# Altium PCB Daughter_Board_PCB_Layout_REV1.PcbDoc
Units mil, origin at the board's own origin, x right, y up, seen from the top; angles counter-clockwise.
Board outline 1712.6 x 1712.6 mil, 2 copper layers (Top Layer, Bottom Layer); 40 components, 46 nets, 178 pads, 238 vias.
Unrouted connection lines stored in the file: 31.
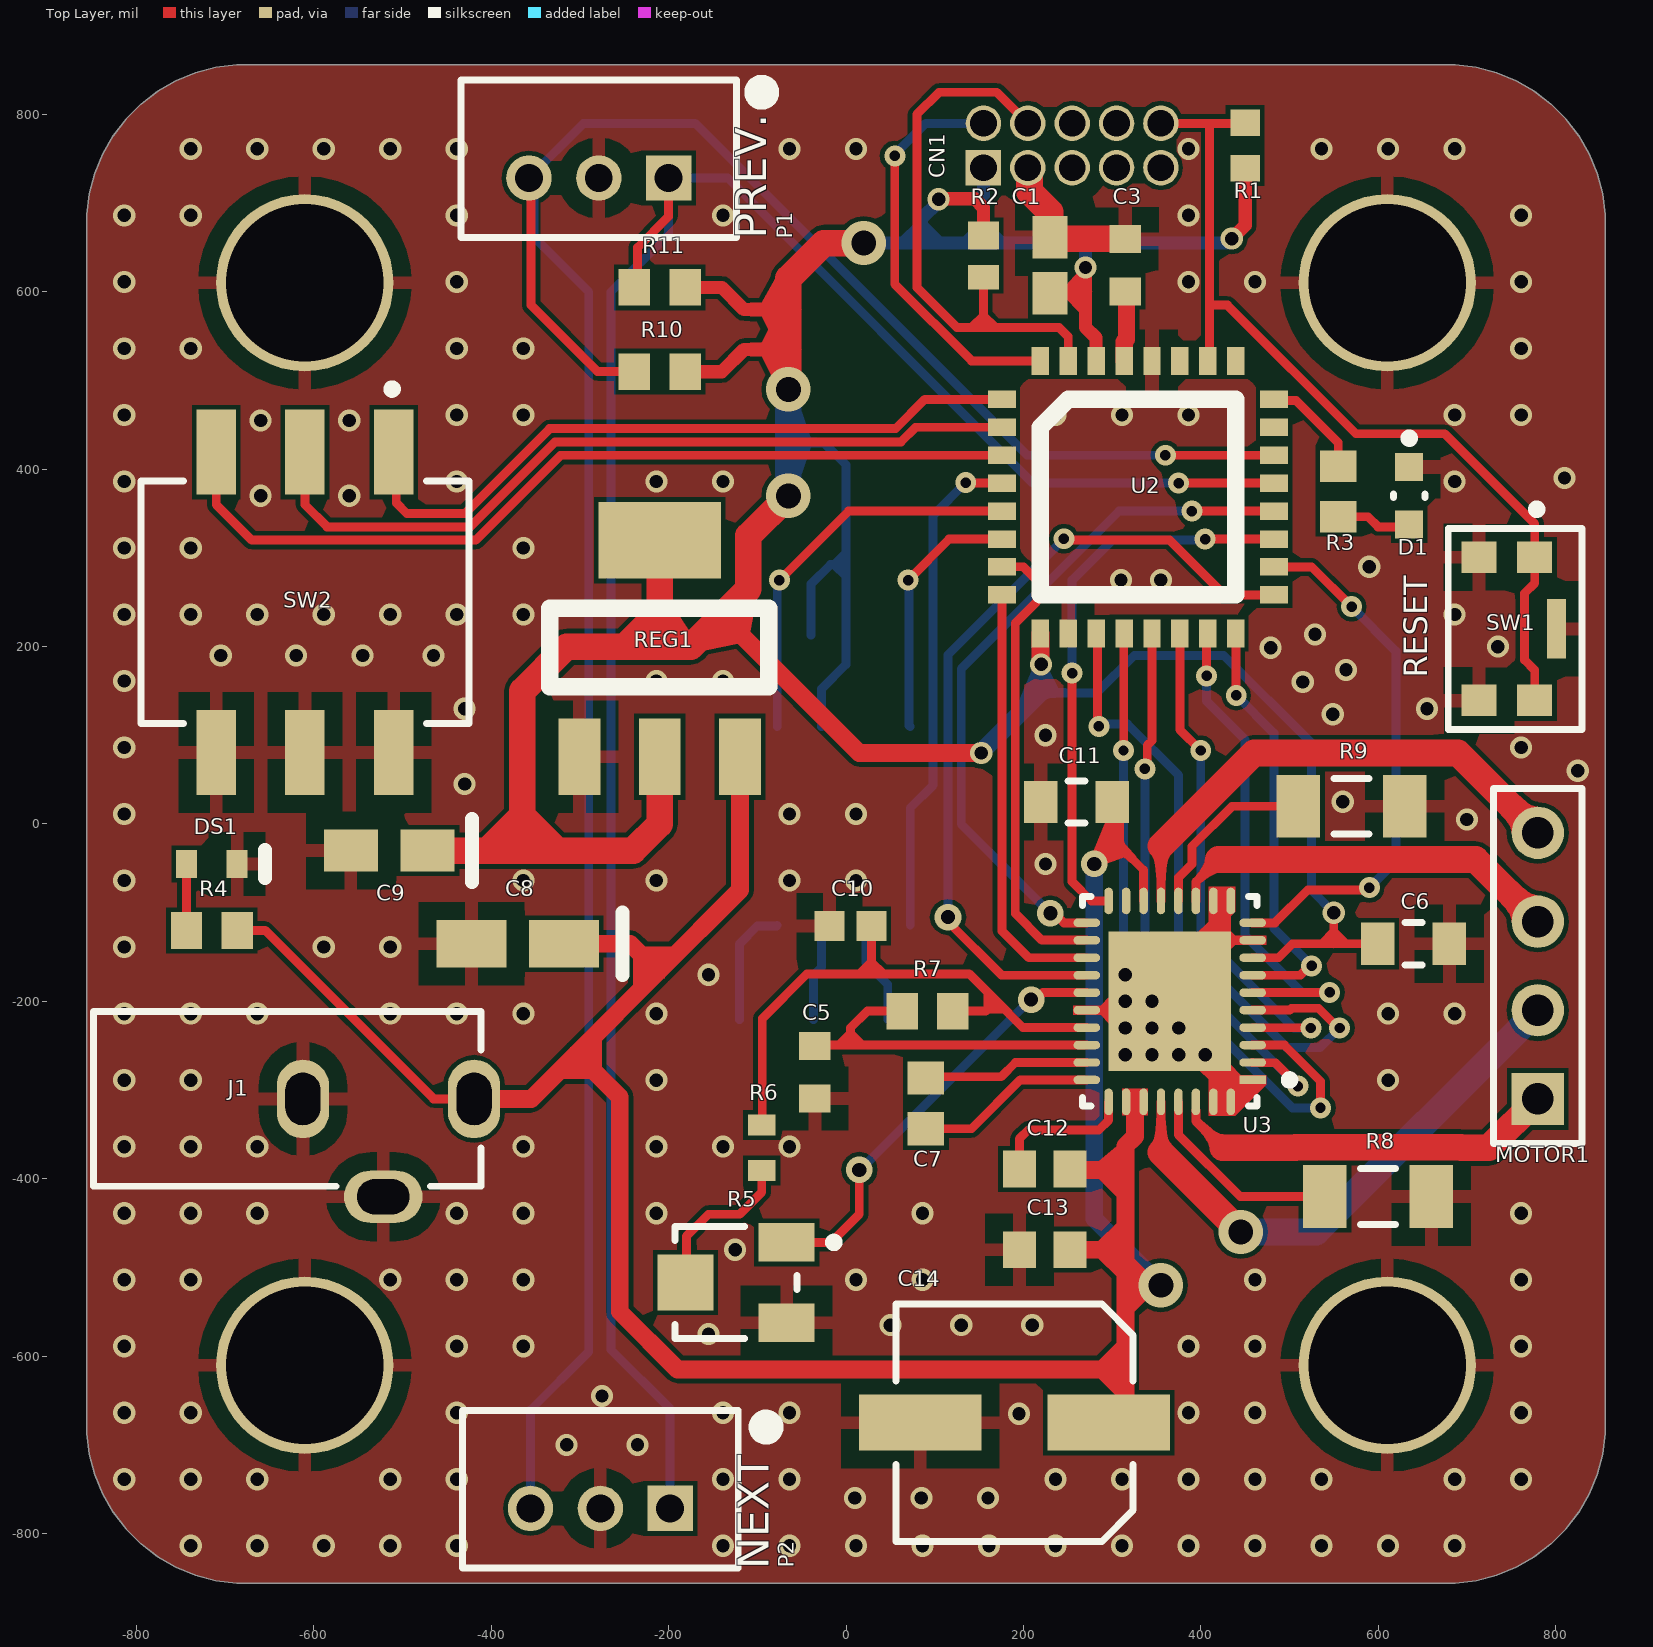
[diagram p0: Top Layer view]
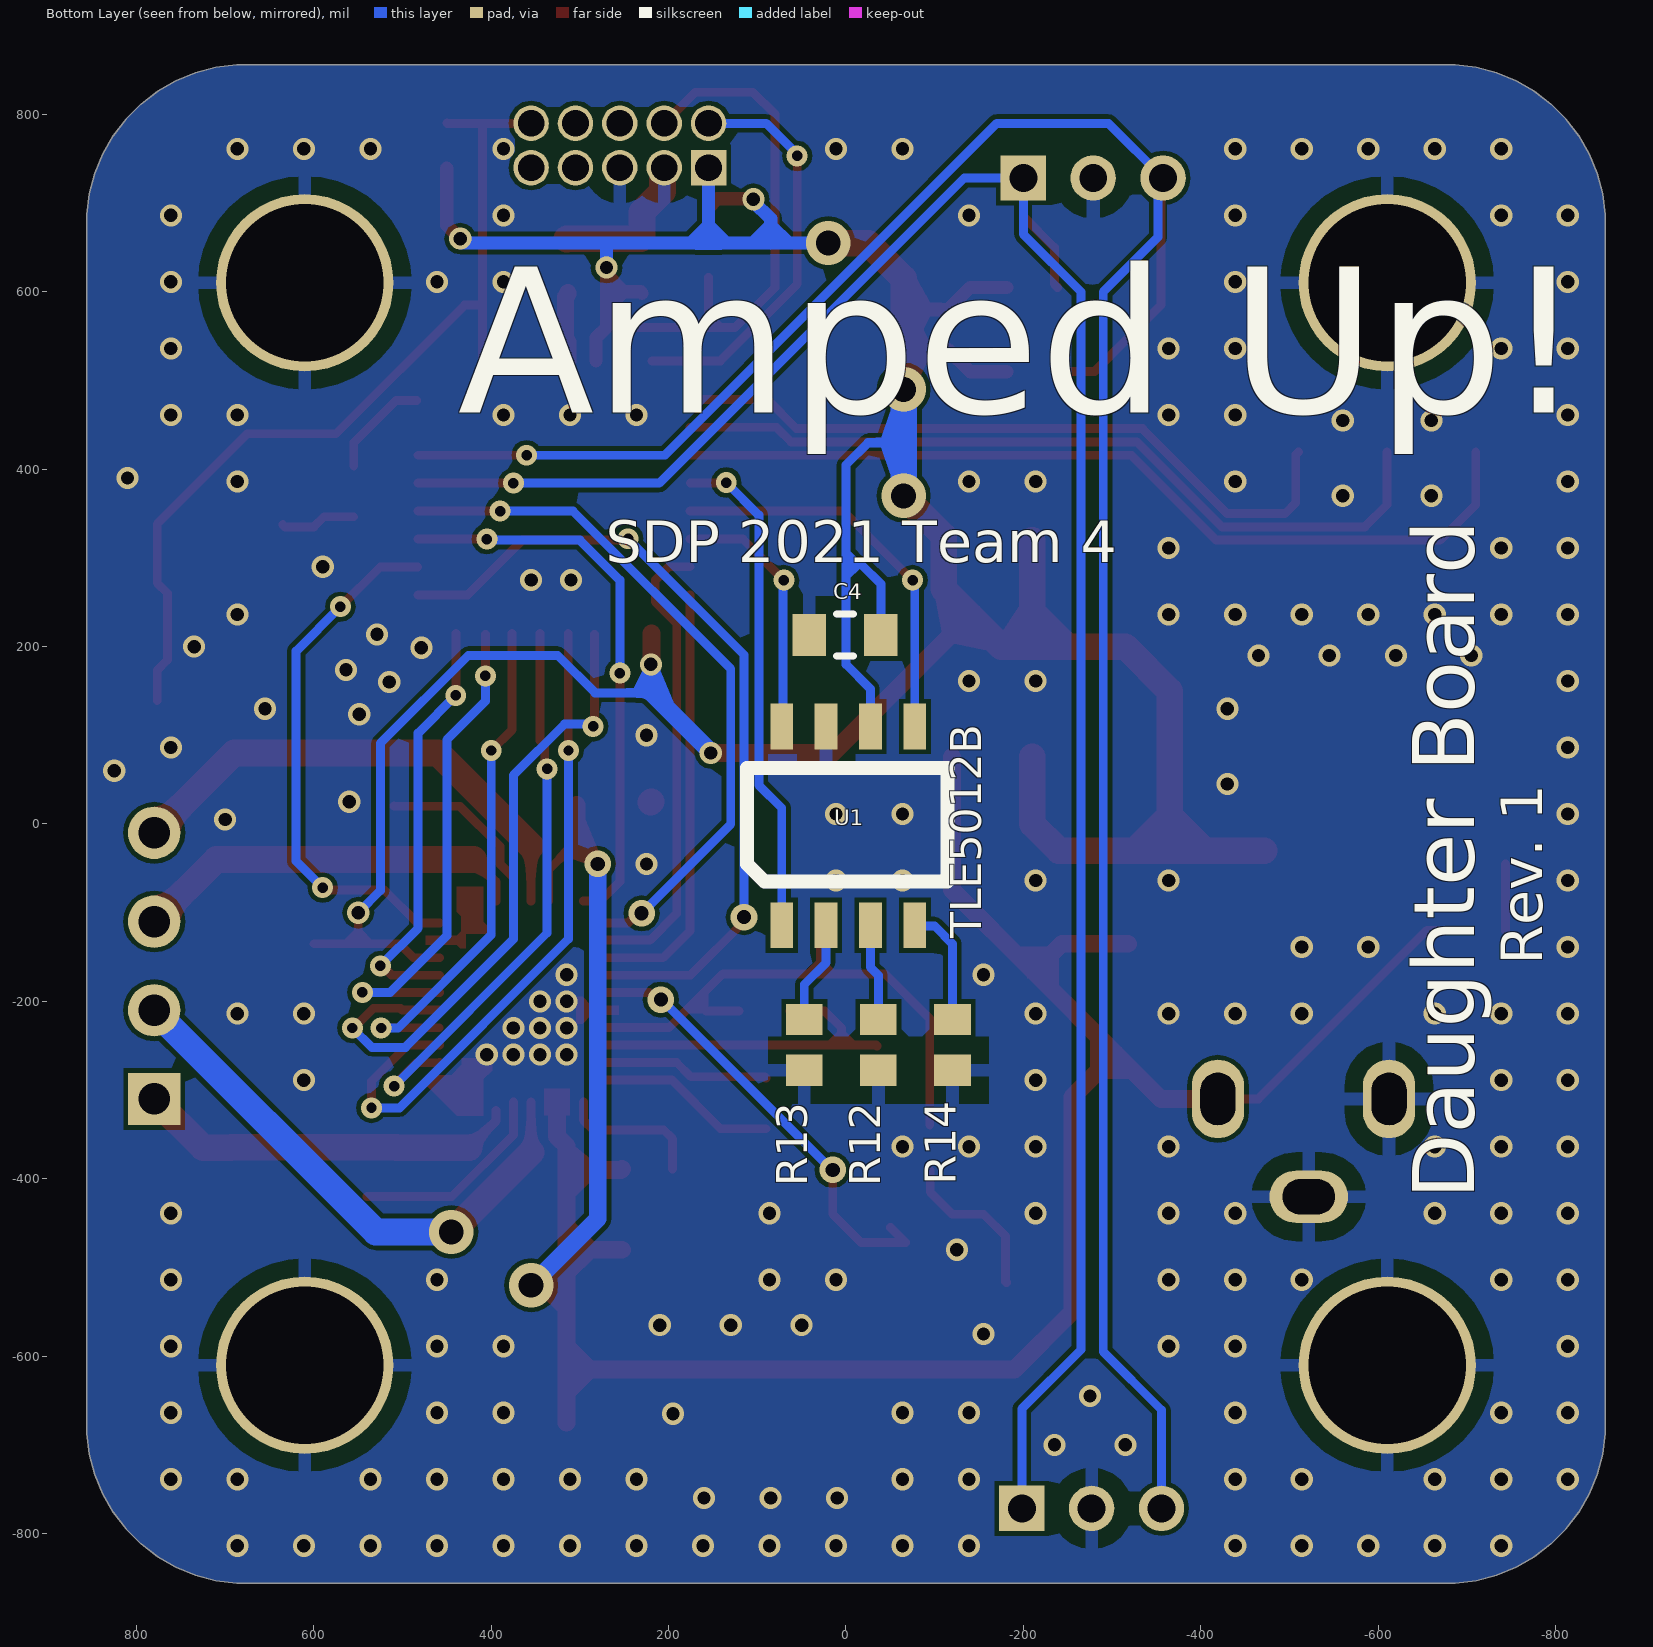
[diagram p1: Bottom Layer view, seen from below]

## Layer stack, top to bottom
Top Solder: solder mask 0.4, Solder Resist, Dk 3.5
Top Layer: signal copper 1.4
Dielectric 1: dielectric 12.6, FR-4, Dk 4.8
Bottom Layer: signal copper 1.4
Bottom Solder: solder mask 0.4, Solder Resist, Dk 3.5

## Board outline
-856.3,-675.2 -856.3,675.2 -856.3,687.07 -853.2,710.6 -847.06,733.54 -837.97,755.47 -826.1,776.03 -811.65,794.86 -794.86,811.65 -776.03,826.1 -755.47,837.97 -733.54,847.06 -710.6,853.2 -687.07,856.3 -675.2,856.3 675.2,856.3 687.07,856.3 710.6,853.2 733.54,847.06 755.47,837.97 776.03,826.1 794.86,811.65 811.65,794.86 826.1,776.03 837.97,755.47 847.06,733.54 853.2,710.6 856.3,687.07 856.3,675.2 856.3,-675.2 856.3,-687.07 853.2,-710.6 847.06,-733.54 837.97,-755.47 826.1,-776.03 811.65,-794.86 794.86,-811.65 776.03,-826.1 755.47,-837.97 733.54,-847.06 710.6,-853.2 687.07,-856.3 675.2,-856.3 -675.2,-856.3 -687.07,-856.3 -710.6,-853.2 -733.54,-847.06 -755.47,-837.97 -776.03,-826.1 -794.86,-811.65 -811.65,-794.86 -826.1,-776.03 -837.97,-755.47 -847.06,-733.54 -853.2,-710.6 -856.3,-687.07 -856.3,-675.2

## Design rules (kind name [scope] priority, off if disabled: settings)
Clearance [All] p1: gap=5 ignorepadtopadclearanceinfootprint=FALSE except(0: Arc-Hole Track-Hole SMDPad-Hole THPad-Hole Via-Hole Fill-Hole Poly-Hole Region-Hole Text-Hole; 10: Arc-THPad Arc-Text Track-THPad Track-Text SMDPad-THPad SMDPad-Text THPad-THPad THPad-Text Via-Text Fill-Text Poly-Text Region-Text Text-Text)
DiffPairsRouting [All] p1: maxlimit=10 minlimit=10 mostfreqgap=10 substack1={84FD49D9-F24D-4FFD-99CB-AB023C1CC38A} toplayer_{84fd49d9-f24d-4ffd-99cb-ab023c1cc38a}_minwidth=15 toplayer_{84fd49d9-f24d-4ffd-99cb-ab023c1cc38a}_maxwidth=15 toplayer_{84fd49d9-f24d-4ffd-99cb-ab023c1cc38a}_prefwidth=15 bottomlayer_{84fd49d9-f24d-4ffd-99cb-ab023c1cc38a}_minwidth=15 bottomlayer_{84fd49d9-f24d-4ffd-99cb-ab023c1cc38a}_maxwidth=15 bottomlayer_{84fd49d9-f24d-4ffd-99cb-ab023c1cc38a}_prefwidth=15 toplayer_minwidth=15 toplayer_maxwidth=15 toplayer_prefwidth=15 bottomlayer_minwidth=15 bottomlayer_maxwidth=15 bottomlayer_prefwidth=15 maxuncoupledlength=500
HoleSize [All] p1: absolutevalues=TRUE maxlimit=1931.5 minlimit=1 maxpercent=80.000 minpercent=20.000
MinimumSolderMaskSliver [All] p1: minsoldermaskwidth=7.87
PolygonConnect [All] p1: thpad.connectstyle=Relief thpad.reliefconductorwidth=15 thpad.reliefentries=4 thpad.polygonreliefangle="90 Angle" thpad.airgapwidth=20 smdpad.connectstyle=Relief smdpad.reliefconductorwidth=15 smdpad.reliefentries=4 smdpad.polygonreliefangle="90 Angle" smdpad.airgapwidth=20 via.connectstyle=Direct via.reliefconductorwidth=15 via.reliefentries=4 via.polygonreliefangle="90 Angle" via.airgapwidth=20
RoutingVias RoutingVias_1 [InNet('+3.3V') OR InNet('+5') OR InNet('GND') OR InNet('VBB')] p1: holewidth=28 width=50 viastyle="Through Hole" minholewidth=15 minwidth=25 maxholewidth=100 maxwidth=150
RoutingVias [All] p2: holewidth=11.81 width=23.62 viastyle="Through Hole" minholewidth=11.81 minwidth=23.62 maxholewidth=248.03 maxwidth=314.96
SilkToSilkClearance [All] p1: silktosilkclearance=0
SilkToSolderMaskClearance [IsPad] p1: minsilkscreentomaskgap=5 clearancetoexposedcopper=TRUE
SolderMaskExpansion SolderMaskExpansion_1 [IsVia] p1: expansion=4 istentingtop=TRUE
SolderMaskExpansion [All] p2: expansion=4 istentingtop=FALSE
Width [All] p1: maxlimit=30 minlimit=6 preferedwidth=10 substack1={84FD49D9-F24D-4FFD-99CB-AB023C1CC38A} toplayer_{84fd49d9-f24d-4ffd-99cb-ab023c1cc38a}_minwidth=10 toplayer_{84fd49d9-f24d-4ffd-99cb-ab023c1cc38a}_maxwidth=40 toplayer_{84fd49d9-f24d-4ffd-99cb-ab023c1cc38a}_prefwidth=20 bottomlayer_{84fd49d9-f24d-4ffd-99cb-ab023c1cc38a}_minwidth=10 bottomlayer_{84fd49d9-f24d-4ffd-99cb-ab023c1cc38a}_maxwidth=40 bottomlayer_{84fd49d9-f24d-4ffd-99cb-ab023c1cc38a}_prefwidth=20 minimp=50.000000 maximp=50.000000 favimp=50.000000
25 further rules are at their usual default settings.

## Components (designator, comment, footprint, x,y, rotation, side; value= is the part's Value field where it differs from the comment)
C1 "10uF" FP-GRM188-0_1-e0_2_0_55-IPC_A 230,630 r270 top
C3 "1uF" FP-CC0603-DA-MFG 315,630 r90 top value="1 uF"
C4 "100nF" FP-CGA3E-0_3-0_1-IPC_A 1,213 r180 bottom
C5 "470nF" FP-CC0603-DA-MFG -35,-280 r90 top value="470 nF"
C6 "100nF" FP-CGA3E-0_3-0_1-IPC_A 640,-135 r0 top
C7 "22nF" CAPC1608X90X35ML10T15 90,-315 r270 top
C8 "10uF" KEMT-A-3216-18-2_M -370,-135 r180 top
C9 "22uF" AVX-TAJ-A-2_L -515,-30 r180 top
C10 "4.7uF" FP-GRM188-0_15-IPC_C 5,-115 r180 top
C11 "100nF" FP-CGA3E-0_3-0_1-IPC_A 260,25 r180 top
C12 "100nF" CAPC1608X90X35ML10T15 224,-389 r0 top
C13 "100nF" CAPC1608X90X35ML10T15 224,-480 r0 top
C14 "10uF" NIC-CAPA2-6.3X5.8_V 190,-675 r180 top
CN1 "JTAG Connector" "Header 5x2 - 50mil" 155,740 r90 top
D1 "APT1608LZGCK" FP-APT1608LZGCK-MFG 635,370 r270 top
DS1 "TLMS1100-GS08" VISH-TLMX1100_V -715,-45 r0 top
J1 "694103303002" 694103303002 -630,-310 r270 top
MOTOR1 "Header 4" HDR1X4 780,-310 r90 top
P1 "B3B-PH-K-S(LF)(SN)" JST-B3B-PH-K-S-3_V -278.74,750 r180 top
P2 "B3B-PH-K-S(LF)(SN)" JST-B3B-PH-K-S-3_V -277,-750 r180 top
R1 "10K" RESC1609X55X30LL15T15 450,765 r90 top
R2 "1K" RESC1608X55X30LL20T20 155,640 r90 top
R3 "330" RESC1608X55X30ML15T15 555,375 r90 top
R4 "500" RESC1608X55X30ML15T15 -715,-120 r0 top
R5 "20K" BOUR-3313J-1_V -124,-517 r180 top
R6 "20K" RESC1608X55X25LL10T15 -95,-365 r90 top
R7 "2.2" RESC1608X55X30ML15T15 92,-211 r0 top
R8 "0.11" RESC3116X65X40ML10T20 600,-420 r0 top
R9 "0.11" RESC3116X65X40ML10T20 570,20 r0 top
R10 "10k" RESC1608X55X30ML15T15 -210,510 r0 top
R11 "10k" RESC1608X55X30ML15T15 -210,605 r0 top
R12 "10k" RESC1608X55X30ML15T15 -36.5,-249 r90 bottom
R13 "10k" RESC1608X55X30ML15T15 47,-249 r90 bottom
R14 "10k" RESC1608X55X30ML15T15 -120,-249 r90 bottom
REG1 "Voltage Reg" SOT223 -300.55,75.91 r0 top
SW1 "KMR211GLFS" FP-KMR211GLFS-MFG 745,220 r270 top
SW2 "219-3MSTR" FP-219-3MSTR-MFG -610,250 r180 top
U1 "TLE5012B" PG-DSO-8 72.44,-114.17 r180 bottom locked
U2 "ATSAMD21E15B-AUT" TQFP-32 175.71,478.78 r0 top
U3 "TMC2130-LA" FP-TMC2130-LA-IPC_C 365,-200 r180 top locked

## Footprints (in the part's own frame and the unit in brackets; to place one, negate y for a bottom-side part, rotate by r counter-clockwise, add the part's x,y. Pads: shape width x height; smd on the part's side, far side on the other; paste and mask are expansions set on the pad)
694103303002 [mm] "DC Power Jack Right Angled(4.2)"
  oval 2.25x1.5 hole 1 slot 1.5 at 0 deg: 1(0,5.35) 2(0,0.45)
  oval 1.5x2.25 hole 1 slot 1.5 at 90 deg: 3(2.8,2.75)
  silkscreen extent -2.5,-5.55 2.5,5.55, body extent -2.5,-5.55 3,5.75, height 7.8
AVX-TAJ-A-2_L [mm] "Molded Capacitor, 2-Leads, Body 3.4x1.8mm, IPC High Density"
  rect 1.55x1.2 smd: 1(-1.1,0) 2(1.1,0)
  silkscreen extent -2.37,-0.9 -2.37,0.9, body extent -1.92,-0.9 1.92,0.9, height 1.8
BOUR-3313J-1_V [mm] "SMD, 3-Leads, Body 3.5x3.2mm, Pitch 1.15mm"
  rect 1.6x1.1 smd paste+0: 1(-1.45,-1.15) 3(-1.45,1.15)
  rect 1.6x1.6 smd paste+0: 2(1.45,0)
  silkscreen extent -2.93,-1.6 1.75,1.6, body extent -1.75,-1.65 1.75,1.65, height 2.11
CAPC1608X90X35ML10T15 [mm] "Chip Capacitor, 2-Leads, Body 1.60x0.80mm, IPC Low Density"
  rect 0.95x1.05 smd: 1(-0.725,0) 2(0.725,0)
  body extent -0.85,-0.45 0.85,0.45, height 0.9
FP-219-3MSTR-MFG [mm]
  rect 1.13x2.44 smd paste+0 mask+0: 1(-2.54,-4.3) 2(0,-4.3) 3(2.54,-4.3) 4(2.54,4.3) 5(0,4.3) 6(-2.54,4.3)
  silkscreen extent -4.69,-6.23 4.69,3.47, body extent -4.8,-5.62 4.8,5.62, height 0.25
FP-APT1608LZGCK-MFG [mm]
  rect 0.8x0.8 smd paste+0 mask+0: 1(-0.825,0) 2(0.825,0)
  silkscreen extent -1.78,-0.45 0.05,0.45, body extent -1.33,-0.55 1.33,0.55, height 0.25
FP-CC0603-DA-MFG [mm]
  rect 0.8x0.9 smd paste+0 mask+0: 1(-0.75,0) 2(0.75,0)
  body extent -1.35,-0.75 1.35,0.75, height 0.25
FP-CGA3E-0_3-0_1-IPC_A [mm]
  rect 0.956x1.206 smd paste+0 mask+0: 1(-1.025,0) 2(1.025,0)
  silkscreen extent -0.25,-0.6 0.25,0.6, body extent -0.8,-0.4 0.8,0.4, height 1.1
FP-GRM188-0_1-e0_2_0_55-IPC_A [mil]
  rect 47.57x39.85 smd paste+0 mask+0: 1(-31.57,0) 2(31.57,0)
  body extent -75,-40 75,40, height 10
FP-GRM188-0_15-IPC_C [mil]
  rect 33.71x33.79 smd paste+0 mask+0: 1(-23.66,0) 2(23.66,0)
FP-KMR211GLFS-MFG [mm]
  rect 0.9x1 smd paste+0 mask+0: 1(-2.05,0.8) 2(2.05,0.8) 3(-2.05,-0.8) 4(2.05,-0.8)
  rect 1.7x0.55 smd paste+0 mask+0: 5(0,1.425)
  silkscreen extent -3.55,-1.68 2.88,2.15
FP-TMC2130-LA-IPC_C [mm]
  rect 0.761x0.242 smd paste+0 mask+0: 1(-2.376,2.25)
  rrect100% 0.761x0.242 smd paste+0 mask+0: 2(-2.376,1.75) 3(-2.376,1.25) 4(-2.376,0.75) 5(-2.376,0.25) 6(-2.376,-0.25) 7(-2.376,-0.75) 8(-2.376,-1.25) 9(-2.376,-1.75) 10(-2.376,-2.25) 19(2.376,-2.25) 20(2.376,-1.75) 21(2.376,-1.25) 22(2.376,-0.75) 23(2.376,-0.25) 24(2.376,0.25) 25(2.376,0.75) 26(2.376,1.25) 27(2.376,1.75) 28(2.376,2.25)
  rrect100% 0.242x0.761 smd paste+0 mask+0: 11(-1.75,-2.876) 12(-1.25,-2.876) 13(-0.75,-2.876) 14(-0.25,-2.876) 15(0.25,-2.876) 16(0.75,-2.876) 17(1.25,-2.876) 18(1.75,-2.876) 29(1.75,2.876) 30(1.25,2.876) 31(0.75,2.876) 32(0.25,2.876) 33(-0.25,2.876) 34(-0.75,2.876) 35(-1.25,2.876) 36(-1.75,2.876)
  rect 3.5x4 smd paste-1000 mask+0: 37(0,0)
  silkscreen extent -3.56,-3 2.5,3, body extent -2.86,-3.36 2.86,3.36, height 0.25
HDR1X4 [mm] "Connector; Header; 4 Position"
  rect 1.5x1.5 hole 0.9: 1(0,0)
  round 1.5 hole 0.9: 2(2.54,0) 3(5.08,0) 4(7.62,0)
  silkscreen extent -1.27,-1.27 8.89,1.27
"Header 5x2 - 50mil" [mil]
  rect 40x40 hole 30 mask+0: 1(0,0)
  round 40 hole 30 mask+0: 2(50,0) 3(0,-50) 4(50,-50) 5(0,-100) 6(50,-100) 7(0,-150) 8(50,-150) 9(0,-200) 10(50,-200)
JST-B3B-PH-K-S-3_V [mm] "Connector, 3-Leads, Body 7.9x4.5mm, Pitch 2mm"
  rect 1.3x1.3 hole 0.8: 1(-2,0.55)
  round 1.3 hole 0.8: 2(0,0.55) 3(2,0.55)
  silkscreen extent -4.92,-2.25 3.95,2.25, body extent -3.95,-2.25 3.95,2.25, height 6
KEMT-A-3216-18-2_M [mm] "Molded TAN Capacitor, 2-Leads, Body 3.4x1.8mm, IPC Low Density"
  rect 2x1.35 smd: 1(-1.325,0) 2(1.325,0)
  silkscreen extent -3,-0.9 -3,0.9, body extent -1.7,-0.9 1.7,0.9, height 1.8
NIC-CAPA2-6.3X5.8_V [mm] "Aluminum Electrolytic Capacitor, Diameter 6.3mm, Height 6.1mm, Pitch 5.4mm"
  rect 3.5x1.6 smd: 1(-2.7,0) 2(2.7,0)
  silkscreen extent -3.4,-3.4 3.4,3.4, body extent -3.14,-3.12 3.14,3.15, height 6.1
PG-DSO-8 [mm]
  rect 0.65x1.31 smd: 1(0,0) 2(1.27,0) 3(2.54,0) 4(3.81,0) 5(3.81,5.69) 6(2.54,5.69) 7(1.27,5.69) 8(0,5.69)
  silkscreen extent -1,1.25 4.75,4.5
RESC1608X55X25LL10T15 [mm] "Chip Resistor, 2-Leads, Body 1.60x0.80mm, IPC High Density"
  rect 0.6x0.8 smd: 1(-0.65,0) 2(0.65,0)
  body extent -0.85,-0.45 0.85,0.45, height 0.55
RESC1608X55X30LL20T20 [mm] "Chip Resistor, 2-Leads, Body 1.60x0.80mm, IPC High Density"
  rect 0.7x0.9 smd: 1(-0.6,0)
  rect 0.8x0.9 smd: 2(0.6,0)
  body extent -0.9,-0.5 0.9,0.5, height 0.55
RESC1608X55X30ML15T15 [mm] "Chip Resistor, 2-Leads, Body 1.60x0.80mm, IPC Low Density"
  rect 0.9x1.05 smd: 1(-0.725,0) 2(0.725,0)
  body extent -0.87,-0.48 0.87,0.48, height 0.55
RESC1609X55X30LL15T15 [mm] "Chip Resistor, 2-Leads, Body 1.75x0.95mm, IPC High Density"
  rect 0.75x0.85 smd: 1(-0.65,0) 2(0.65,0)
  body extent -0.87,-0.48 0.87,0.48, height 0.55
RESC3116X65X40ML10T20 [mm] "Chip Resistor, 2-Leads, Body 3.10x1.60mm, IPC Low Density"
  rect 1.25x1.8 smd: 1(-1.525,0) 2(1.525,0)
  silkscreen extent -0.5,-0.8 0.5,0.8, body extent -1.6,-0.85 1.6,0.85, height 0.65
SOT223 [mm]
  rect 1.2x2.2 smd: 1(0,0) 2(2.3,0) 3(4.6,0)
  rect 3.5x2.2 smd: 4(2.3,6.2)
  silkscreen extent -0.85,2 5.43,4.25
TQFP-32 [mm]
  rect 0.8x0.5 smd mask+0: 1(0,0) 2(0,-0.8) 3(0,-1.6) 4(0,-2.4) 5(0,-3.2) 6(0,-4) 7(0,-4.8) 8(0,-5.6) 17(7.8,-5.6) 18(7.8,-4.8) 19(7.8,-4) 20(7.8,-3.2) 21(7.8,-2.4) 22(7.8,-1.6) 23(7.8,-0.8) 24(7.8,0)
  rect 0.5x0.8 smd mask+0: 9(1.1,-6.7) 10(1.9,-6.7) 11(2.7,-6.7) 12(3.5,-6.7) 13(4.3,-6.7) 14(5.1,-6.7) 15(5.9,-6.7) 16(6.7,-6.7) 25(6.7,1.1) 26(5.9,1.1) 27(5.1,1.1) 28(4.3,1.1) 29(3.5,1.1) 30(2.7,1.1) 31(1.9,1.1) 32(1.1,1.1)
  silkscreen extent 1.1,-5.6 6.7,0
VISH-TLMX1100_V [mm] "SMD, 2-Leads, Body 1.6x0.8mm"
  rect 0.6x0.8 smd: 1(-0.725,0) 2(0.725,0)
  silkscreen extent 1.52,-0.4 1.52,0.4, body extent -0.8,-0.4 0.8,0.4, height 0.65

## Part data
C1: library part CMP-2006-02792-2, "Chip Multilayer Ceramic Capacitors for General Purpose, 0603, 10uF, X5R, 15%, 20%, 6.3V", Case Code (Imperial)=0603, Case Code (Metric)=1608, Dielectric=X5R, Max Operating Temperature=85°C, Min Operating Temperature=-55°C, Package Quantity=4000, Tolerance=20%, Voltage=6.3V, Capacitance=10uF, Case/Package=0603, Depth=0.8mm, Height=0.8mm, Lead Free="Lead Free", Length=1.6mm, Material=Ceramic, Mount="Surface Mount", Packaging="Tape and Reel", Radiation Hardening=No, REACH SVHC="No SVHC", Termination=SMD/SMT, Thickness=0.035inch, Voltage Rating=6.3V, Voltage Rating (DC)=6.3V, Width=0.031inch
C3: library part CMP-03422-000924-1, "CAP CER 1UF 16V X7R 0603", Capacitance="1 uF", Manufacturer=YAGEO, Manufacturer Part Number=CC0603KRX7R7BB105, Package=CC0603-DA, Temperature="-55°C to +125°C", Temperature Characteristic=X7R, Temperature Coefficient=15%, Temperature Range High=+125°C, Temperature Range Low=-55°C, Tolerance=0.1, Voltage="16 V", Automotive=No, Category=Cap, ComponentLink2Description=Datasheet, ComponentLink2URL=http://www.yageo.com/documents/recent/UPY-GPHC_X7R_6.3V-to-50V_18.pdf, Device Class L1="Passive Components", Device Class L2=Capacitors, Device Class L3="Ceramic Capacitors", Digikey Description="CAP CER 1UF 16V X7R 0603", Footprint Url=http://www.yageo.com/exep/pages/download/literatures/UPY-C_GEN_24.pdf, Height=0.9mm, Lead Free=Yes, Material=Ceramic, Mouser Description="Multilayer Ceramic Capacitor, CC Series, 1 - F, - 10%, X7R, 16 V, 0603 [1608 Metric]", Octopart=https://octopart.com/cc0603krx7r7bb105-yageo-42271928, RoHS=TRUE, Voltage Rating="16 V"
C4: library part CMP-2000-07546-2, "Cap Ceramic 100nF 50V X7R 10% Pad SMD 0603 +125°C Automotive T/R", Case Code (Imperial)=0603, Case Code (Metric)=1608, Dielectric=X7R, Max Operating Temperature=125°C, Min Operating Temperature=-55°C, Package Quantity=1, Ratings=AEC-Q200, Tolerance=10%, Voltage=50V, Capacitance=100nF, Case/Package=0603, Composition=Ceramic, Depth=0.8mm, Height=0.8mm, Lead Free="Lead Free", Length=1.6mm, Mount="Surface Mount", Packaging="Tape and Reel", Radiation Hardening=No, REACH SVHC="No SVHC", Termination=SMD/SMT, Thickness=0.035inch, Voltage Rating=50V, Voltage Rating (DC)=50V, Weight=7.1E-05oz, Width=0.8mm
C5: library part CMP-1035-02696-2, "CAP CER 0.47UF 10V X7R 0603", Capacitance="470 nF", Manufacturer=YAGEO, Manufacturer Part Number=CC0603KRX7R6BB474, Package=CC0603-DA, Temperature="-55°C to +125°C", Temperature Characteristic=X7R, Temperature Coefficient=15%, Temperature Range High=+125°C, Temperature Range Low=-55°C, Tolerance=0.1, Voltage="10 V", Automotive=No, Category=Cap, ComponentLink2Description=Datasheet, ComponentLink2URL=http://www.yageo.com/documents/recent/UPY-GPHC_X7R_6.3V-to-50V_18.pdf, Device Class L1="Passive Components", Device Class L2=Capacitors, Device Class L3="Ceramic Capacitors", Digikey Description="CAP CER 0.47UF 10V X7R 0603", Footprint Url=http://www.yageo.com/exep/pages/download/literatures/UPY-C_GEN_24.pdf, Height=0.9mm, Lead Free=Yes, Material=Ceramic, Mouser Description="Multilayer Ceramic Capacitors MLCC - SMD/SMT 470nF 10V X7R 10%", Octopart=https://octopart.com/cc0603krx7r6bb474-yageo-9287391, RoHS=TRUE, Voltage Rating="10 V"
C6 C11: library part CMP-2000-04983-3, "Cap Ceramic 100nF 100V X7S 10% Pad SMD 0603 +125°C Automotive T/R", Case Code (Imperial)=0603, Case Code (Metric)=1608, Dielectric=X7S, Max Operating Temperature=125°C, Min Operating Temperature=-55°C, Package Quantity=1, Ratings=AEC-Q200, Tolerance=10%, Voltage Rating=100V, Capacitance=100nF, Case/Package=0603, Composition=Ceramic, Depth=0.8mm, Height=0.8mm, Lead Free="Lead Free", Length=1.6mm, Mount="Surface Mount", Packaging="Tape and Reel", Radiation Hardening=No, REACH SVHC="No SVHC", Termination=SMD/SMT, Thickness=0.035inch, Voltage Rating (DC)=100V, Weight=7.1E-05oz, Width=0.031inch
C7: library part CMP-2006-02910-1, Manufacturer=Murata, Part Number=GRM188R71H223KA01D
C8: library part CMP-2000-05172-1, "Capacitor, Tantalum, 10 uF, +/- 10%, 10 V, -55 to 125 degC, 2-Pin SMD (1206), RoHS, Tape and Reel", Capacitance=10µF, ESR (Equivalent Series Resistance)=3.8Ohm, Lifetime @ Temp.=2000Hrs@85degC, Manufacturer=Kemet, Manufacturer Size Code=A, Operating Temperature=-55degC~125degC, Package / Case=1206(3216Metric), Package Description="2-Pin Surface Mount Device, Body 3.2 x 1.6 mm", Package Reference=1206, Standard Package=2,000, Tolerance=±10%, Voltage - Rated=10V, Catalog Drawings=T49x,T5xxSeries_A-side1T49x,T5xxSeries_A,B-side2T49x,T5xxSeries_A,SBottom, Category=Capacitors, Datasheet URL=http://www.farnell.com/datasheets/1824869.pdf, Datasheet Version=Apr-14, Family=TantalumCapacitors, Features=GeneralPurpose, Height - Seated (Max)="0.071\"(1.80mm)", Lead Spacing=-, Manufacturer URL=http://www.kemet.com/, Mounting Type=SurfaceMount, Online Catalog=T491Series, Other Names=399-3684-2, Packaging=Tape&Reel(TR), Product Training Modules=CapacitorBasics-TypicalUsesforCapacitorsDeratingGuidelinesforSurfaceMountTantalumCapacitors, Series=T491, Size / Dimension="0.126\"Lx0.063\"W(3.20mmx1.60mm)", Type=Molded
C9: library part CMP-2000-07524-1, "Chip Capacitor, 22 uF, +/- 10%, 10 V, -55 to 125 degC, 1206 (3216 Metric), RoHS, Tape and Reel", Case Code (Imperial)=1206, Case Code (Metric)=3216, Dielectric Material=Tantalum, ESR (Equivalent Series Resistance)=3Ohm, Leakage Current=2.2uA, Manufacturer=AVX, Max Operating Temperature=125degC, Min Operating Temperature=-55degC, Package Description="2-Pin Surface Mount Device, Body 3.2 x 1.65 mm", Package Quantity=1, Package Reference=TAJ-A-2, Tolerance=10%, Voltage=10V, Capacitance=22uF, Case/Package=1206, Datasheet URL=http://datasheets.avx.com/TAJ.pdf, Datasheet Version=09/2017, Depth=1.6mm, Dissipation Factor=8%, Height=1.6mm, Height - Seated (Max)=0.071inch, Lead Free=LeadFree, Lead Pitch=1.1mm, Length=3.2mm, Manufacturer URL=http://www.avx.com/, Mount=PCB, Mounting Technology=SurfaceMount, Number of Pins=2, Packaging=TapeandReel, Polarity=Polar, Radiation Hardening=No, REACH SVHC=NoSVHC, RoHSCompliant=True, Termination=SMD/SMT, Voltage Rating=10V, Voltage Rating (DC)=10V, Width=1.6mm
C10: library part CMP-2006-02523-2, "Chip Multilayer Ceramic Capacitors for General Purpose, 0603, 4.7uF, X5R, 15%, 10%, 25V", Case Code (Imperial)=0603, Case Code (Metric)=1608, Dielectric=X5R, Max Operating Temperature=85°C, Min Operating Temperature=-55°C, Package Quantity=4000, Tolerance=10%, Voltage=25V, Capacitance=4.7uF, Case/Package=0603, Depth=0.8mm, Height=0.8mm, Lead Free="Lead Free", Length=1.6mm, Material=Ceramic, Mount="Surface Mount", Packaging="Cut Tape", REACH SVHC="No SVHC", Thickness=0.031inch, Voltage Rating=25V, Voltage Rating (DC)=25V, Width=0.031inch
C12 C13: library part CMP-2100-03643-1, "Chip Capacitor, 0.1 uF, +/- 10%, 50 V, -55 to 125 degC, 0603 (1608 Metric), RoHS, Tape and Reel", Case Code (Imperial)=0603, Case Code (Metric)=1608, Dielectric=X7R, Dielectric Material=Ceramic, Insulation Resistance=10GR, Manufacturer=Murata, Max Operating Temperature=125degC, Min Operating Temperature=-55degC, Package Description="2-Pin Surface Mount Device, Body 1.6 x 0.8 mm", Package Quantity=1, Tolerance=10%, Voltage=50V, Capacitance=100nF, Case/Package=0603, Contact Plating=Tin, Datasheet URL=http://psearch.en.murata.com/capacitor/product/GRM188R71H104KA93%23.pdf, Datasheet Version=42675.0, Depth=0.8mm, Height=0.8mm, Lead Free=LeadFree, Length=1.6mm, Manufacturer URL=http://www.murata.com/, Material=Ceramic, Mount=SurfaceMount, Number of Pins=2, Package Reference=0603, Packaging=TapeandReel, Radiation Hardening=No, REACH SVHC=NoSVHC, RoHSCompliant=true, Termination=SMD/SMT, Thickness=0.035inch, Voltage Rating=50V, Voltage Rating (DC)=50V, Width=0.8mm
C14: library part CMP-0687-00043-1, "Aluminum Electrolytic Capacitor, UD Series, Low Impedance, 10 uF, 50 V, + / - 20%, -55 to 105 degC, Chip Type, 6.3 x 5.8 mm D x L, Pb-Free, Reel", Manufacturer=Nichicon, PartNumber=UUD1H100MCL1GS, Rated Capacitance="10 uF", Rated Ripple Current (at 100kHz)="165 mA", Rated Voltage="50 V", Tolerance Rated Capacitance="-20 to 20%", ComponentLink1Description="Manufacturer URL", ComponentLink1URL=http://www.nichicon.co.jp/, ComponentLink2Description=Datasheet, ComponentLink2URL=http://products.nichicon.co.jp/en/pdf/XJA043/e-ud.pdf, ComponentLink3Description="Package Specification", ComponentLink3URL=http://products.nichicon.co.jp/en/pdf/XJA043/e-ud.pdf, DatasheetVersion=08/2012, Diameter="6.3 mm", Endurance Time="2000 h", Impedance="0.88 Ohm", Length="5.8 mm", Mounting Technology="Surface Mount", PackageDescription="2-Pin Surface Mount Device, Diameter 6.3 mm, Height 5.8 mm, Pitch 5.4 mm", PackageReference=CAPAE-D6.3H5.8, Packing="Dia382mm Reel", RoHS=TRUE
D1: library part CMP-44529-000040-1, "LED GREEN CLEAR 2SMD", Case Code (Imperial)=0603, Case Code (Metric)=1608, Color=Green, Forward Voltage=2.65V, Lens Color=Colorless, Test Current=2mA, Case/Package=0603, Dominant Wavelength=525nm, Height=0.75mm, Length=1.6mm, Lens Transparency=Clear, Luminous Intensity=50mcd, Mount="Surface Mount", Packaging="Cut Tape", Viewing Angle=120°, Width=0.8mm
DS1: library part CMP-1666-00027-1, "LED, RED, 2.1 V, -40 to 100 degC, 2-Pin SMD (0603), RoHS, Tape and Reel", Capacitance="12 pF", Case Code (Imperial)=0603, Case Code (Metric)=1608, Max Operating Temperature=125degC, Min Operating Temperature=-55degC, Package Quantity=4000, Resistance="100000000000 Ohm", Tolerance=5%, Type (Capacitors)=C0G, Voltage Rating="50 V", Case/Package=0603, ComponentLink1Description="Manufacturer URL", ComponentLink1URL=http://www.vishay.com/, ComponentLink2Description=Datasheet, ComponentLink2URL=http://www.vishay.com/docs/83173/tlmb1100.pdf, DatasheetVersion="Rev. 2.7, 03/2016", Height="0.8 mm", Length="1.6 mm", Mount="Surface Mount", PackageDescription="2-Pin Surface Mount Device, Body 1.6 x 0.8 mm", PackageReference=TLMX1100, Packaging="Tape and Reel", Pins=2, Radiation Hardening=No, REACH SVHC="No SVHC", RoHSCompliant=True, Voltage Rating (DC)="50 V", Width="0.8 mm"
J1: library part CMP-1502-00185-1, "DC Power Jack Connector WR-DC, Male, Right Angled, THT, 2 A, 30 V", Manufacturer="Wurth Elektronik", Operating Temperature=-40to85degC, Rated Current=2A, Working Voltage=30V, Datasheet URL=http://katalog.we-online.de/em/datasheet/6941xx303002.pdf, Gender=Male, Manufacturer URL=http://www.we-online.de, Mounting Technology=THT, Opening Diameter=4.2mm, Orientation=RightAngled, Package Reference=694103303002, Packaging=Bag, Part Number=694103303002, Plug Inner Diameter=1.35mm, Plug Outer Diameter=3.5mm, Publisher=WurthElektronik
MOTOR1: "Header, 4-Pin", LatestRevisionDate=17-Jul-2002, LatestRevisionNote="Re-released for DXP Platform.", Publisher="Altium Limited"
P1 P2: library part CMP-2000-05164-1, "Male Header, Pitch 2 mm, 1 x 3 Position, Height 6 mm, Tail Length 3.4 mm, -25 to 85 degC, RoHS, Bulk", Manufacturer=JST, Datasheet URL=https://datasheet.ciiva.com/11746/0900766b80826550-11746939.pdf, Datasheet Version=Oct-06, Manufacturer URL=http://www.jst.com/home2.html, No of Positions=3, Pitch=2mm, Style/Orientation=StraightHeader/Plug, Termination=Crimp, Type=ShroudedHeader
R1: library part CMP-1012-00623-3, "Chip Resistor, 10 KOhm, +/- 1%, 0.1 W, -55 to 155 degC, 0603 (1608 Metric), RoHS, Tape and Reel", Case Code (Imperial)=0603, Case Code (Metric)=1608, Manufacturer=Panasonic, Max Operating Temperature=155degC, Max Power Dissipation=100mW, Min Operating Temperature=-55degC, Package Description="2-Pin Surface Mount Device, Body 1.6 x 0.85 mm", Package Quantity=1, Package Reference=603, Resistance=10KOhm, Temperature Coefficient=100ppm\/degreesC, Tolerance=1%, Voltage Rating=75V, Case\/Package=0603, Composition=ThickFilm, Contact Plating=Tin, Datasheet URL=https://industrial.panasonic.com/cdbs/www-data/pdf/RDA0000/AOA0000C304.pdf, Datasheet Version=02/2017, Depth=0.8mm, Height=0.45mm, Lead Free=LeadFree, Length=1.6mm, Manufacturer URL=http://www.panasonic.com/, Military Standard=Not, Mount=SurfaceMount, Mounting Technology=SurfaceMount, Number of Pins=2, Number of Terminations=2, Packaging=TapeandReel, Power Rating=100mW, Radiation Hardening=No, REACH SVHC=NoSVHC, RoHSCompliant=true, Termination=SMD/SMT, Voltage Rating (DC)=75V, Width=0.031inch
R2: library part CMP-2000-00873-1, Manufacturer=Panasonic, Part Number=ERA3AEB102V
R3 R4 R7 R10 R11 R12 R13 R14: library part CMP-2000-00866-1, Manufacturer=Panasonic, Part Number=ERJ-3RSJR10V
R5: library part CMP-2000-05586-1, "3 mm Trimpot(R) Trimming Potentiometer, 20 KOhm, +/- 20%, 0.125 W, -55 to 125 degC, 3-Pin SMD, RoHS, Tape and Reel", Dielectric Strength=500VAC, Insulation Resistance=100Megohms(Min.)@500VDC, Manufacturer=Bourns, Package Description="3-Pin Surface Mount Device, Body 3.5 x 3.2 mm, Pitch 1.15 mm", Package Reference=3313J-1, Power, Rating=0.125W, Resistance=20Kilohms, Resistance, Insulation=100Megohms, Temperature Coefficient=±100ppm/°C, Temperature, Operating, Maximum=+125°C, Temperature, Operating, Minimum=-55°C, Tolerance=±20%, Angle, Mechanical=250°, Brand/Series=Trimpot®3313-SealedSeries, Datasheet URL=http://www.bourns.com/docs/Product-Datasheets/3313.pdf, Datasheet Version=05/2016, Dimensions="0.126\"Lx0.138\"Wx0.087\"H", Load Life=1000hr@0.125W,70°C, Manufacturer URL=http://www.bourns.com/, Material, Element=Cermet, Mounting Technology=SurfaceMount, Mounting Type=SurfaceMount, Number of Turns=1, Resolution=Infinite, Rotational Life=100Cycles, Standards=RoHSCompliant, Termination=SMD, Torque=50g-cm, Type=Trimmer
R6: library part CMP-2000-06932-1, "Chip Resistor, 20 KOhm, +/- 1%, 0.1 W, -55 to 155 degC, 0603 (1608 Metric), RoHS, Tape and Reel", Case Code - in=0603, Case Code - mm=1608, Manufacturer=Yageo, Operating Temperature Range=-55Cto+155C, Package Description="2-Pin Surface Mount Device, Body 1.6 x 0.8 mm", Power Rating=100mW, Resistance=20kOhms, Temperature Coefficient=100PPM/C, Tolerance=1%, Voltage Rating=50V, Datasheet URL=http://www.yageo.com/documents/recent/PYu-RC_Group_51_RoHS_L_7.pdf, Datasheet Version="Rev. 7, 05/2017", Manufacturer URL=http://www.yageo.com/, Mounting Technology=SurfaceMount, Package Reference=0603, Packaging=Reel, Product=ThickFilmResistorsGeneralPurpose, Series=RC, Termination Style=SMD/SMT
R8 R9: library part CMP-2003-04052-1, Manufacturer=Yageo, Part Number=RL1206FR-7W0R56L
SW1: library part CMP-10040-000023-1, "SWITCH TACTILE SPST-NO 0.05A 32V", Contact Current Rating=50mA, Max Operating Temperature=85°C, Max Voltage Rating (DC)=32V, Min Operating Temperature=-40°C, Operating Force=1.2N, Package Quantity=1, Power Rating=1W, Actuator Length=0.5mm, Actuator Type=Standard, Contact Material=Silver, Contact Plating=Silver, Current Rating=50mA, Depth=4.6mm, Illumination Type=Non-Illuminated, Lead Free="Lead Free", Length=2.8mm, Max Current Rating=50mA, Mechanical Life=200000Cycles, Mount="Surface Mount", Orientation=Straight, Packaging="Tape and Reel", Radiation Hardening=No, REACH SVHC="No SVHC", Switch Function=Off-Mom, Switch Travel=0.2mm, Termination="Gull Wing", Throw Configuration=SPST, Voltage Rating (DC)=32V, Width=2.8mm
SW2: library part CMP-07018-000004-1, "SWITCH SLIDE DIP SPST 100MA 20V", Current Rating=100mA, Max Operating Temperature=85°C, Max Voltage Rating (DC)=20V, Min Operating Temperature=-55°C, Package Quantity=1000, Actuator Type="Slide (Standard)", Contact Material=Copper, Contact Plating=Gold, Electrical Life=2000Cycles, Lead Free="Lead Free", Length=0.358inch, Max Current Rating=100mA, Mechanical Life=2000Cycles, Mount="Surface Mount", Number of Positions=3, Orientation=Straight, Packaging="Tape and Reel", Pitch=0.1inch, Termination="Gull Wing", Throw Configuration=SPST, Voltage Rating (DC)=20V, Washable=Yes
U1: "TLE5012B GMR-Based Angle Sensor PG-DSO-8"
U2: "IC MCU 32BIT 32KB FLASH 32TQFP"
U3: library part CMP-237673-000001-1, "IC MTR DRV BIPOLAR 5.5-46V 36QFN", Manufacturer=Trinamic, Max Junction Temp=+125°C, Max Power Dissipation=2.6W, Max Supply Voltage=46V, Min Supply Voltage=3V, Nominal Supply Current=2-19mA, Output Current=2.5A, Output Voltage=4.75-46V, Package=0, Temperature="-40°C to +125°C", Temperature Range Low=-40°C, Automotive=No, Category=IC, ComponentLink2Description=Datasheet, ComponentLink2URL=https://www.trinamic.com/fileadmin/assets/Products/ICs_Documents/TMC2130_datasheet_Rev1.11.pdf, Device Class L1="Integrated Circuits (ICs)", Device Class L2="Power Management ICs", Device Class L3="Motor Drivers", Digikey Description="IC MTR DRV BIPOLAR 5.5-46V 36QFN", Height=0.9mm, Ipc Land Pattern Name=QFN50P500X600X85-36, Lead Free=Yes, Manufacturer Part Number=TMC2130-LA, Motor Type=Stepper, Number Of Outputs=1, Octopart=https://octopart.com/tmc2130-la-trinamic-61933290, RoHS=TRUE, Standoff Height=0mm, Temperature Range High=+125°C

## Free pads (board coordinates)
  round 200 hole 177.17: MNT(-610.24,-610.24) MNT(-610.24,610.24) MNT(610.24,-610.24) MNT(610.24,610.24)

## Via types
v1: diameter 25, hole 15, Top Layer to Bottom Layer, tented both sides, 204 vias
v2: diameter 23.62, hole 11.81, Top Layer to Bottom Layer, tented both sides, 24 vias
v3: diameter 50, hole 28, Top Layer to Bottom Layer, tented both sides, 5 vias
v4: diameter 30, hole 16, Top Layer to Bottom Layer, tented both sides, 5 vias

## Nets (pads, with @x,y where several pads share a name; then routed paths per layer and width w, separated by ;. In a path a pad name is that pad's centre, name@x,y a point inside that pad or via, vN(x,y) a via of type N, cw(c..) or ccw(c..) an arc to the next point about the centre after c; other vN are vias at no path point)
+3.3V: C1.2 C4.2 C6.1 C9.1 CN1.1 R1.1 R2.2 R10.2 R11.2 REG1.2 REG1.4 U1.6 U2.9 U2.30 U3.8 | length 4340.4
  Top Layer w10: U3.8 487.68,-150.79 503.46,-135 550,-135 ; v1(550,-100) 550,-135 ; C6.1 550,-135
  Top Layer w15: R10.2 -140,510 -115,535 -65,535 ; R11.2 -140,605 -115,580 -65,580 ; v1(104.41,704.41) 105,705 145,705 155,695 R2.2 ; C1.2 231.57,600 270,600 ; v1(270,627.5) 270,600 ; U2.30@281.85,522.24 281.85,548.15 270,560 270,600 ; v1(435,660) 450,675 R1.1
  Top Layer w20: -140,235 15,80 v1(152.5,80) ; U2.9@219.17,214.84 219.17,180.83 v1(220,180)
  Top Layer w30: C9.1 -365,-30 ; REG1.2 -210,0 -240,-30 -365,-30 ; REG1.4 -210,200 ; v3(-65,370) -110,325 -110,265 -140,235 -175,200 -210,200 ; v3(-65,490) -65,535 -65,580 -65,615 -25,655 v3(20,655) ; -365,-30 -365,150 -315,200 -210,200
  Bottom Layer w10: -65,430 -25,430 0,405 0,292.5 ; C4.2 -39.35,270.65 -17.5,292.5 0,292.5 ; U1.6 -27.56,152.44 0,180 0,292.5 ; 219.04,147.79 282.79,147.79 325,190 425.85,190 525,90.85 525,-75 v1(550,-100)
  Bottom Layer w15: v3(20,655) 85,655 ; v1(104.41,704.41) 104.41,701.71 85,682.29 85,655 ; CN1.1 155,655 ; v1(270,627.5) 270,655 ; v1@435,655 270,655 ; 85,655 155,655 ; 155,655 270,655
  Bottom Layer w20: v1(152.5,80) 152.5,81.25 219.04,147.79 219.04,179.04 v1(220,180)
  Bottom Layer w30: v3(-65,370) -65,430 v3(-65,490)
+5: C10.1 R6.2 R7.2 U3.25 | length 639.4
  Top Layer w10: R6.2@-94.41,-339.41 -94.41,-219.41 -44,-169 28.66,-169 ; C10.1 28.66,-169 ; R7.2 157.53,-211 169.26,-199.26 ; U3.25 199.53,-229.53 169.26,-199.26 ; 28.66,-169 139,-169 169.26,-199.26
A1: MOTOR1.1 U3.34 | length 432.5
  Top Layer w10: U3.34@394.75,-323.19 394.75,-334.75 425,-365
  Top Layer w30: 425,-365 506.64,-365 507.07,-364.57 692.93,-364.57 693.36,-365 725,-365 MOTOR1.1
A2: MOTOR1.2 U3.32 | length 622.6
  Top Layer w10: 355.16,-370.16 U3.32
  Top Layer w30: 355.16,-370.16 v3(445,-460)
  Bottom Layer w30: v3(445,-460) 530,-460 MOTOR1.2
AIN_REF: R5.1 U3.23 | length 507.9
  Top Layer w10: R5.1@-50.26,-455.07 R5.1 -16.72,-471.72 15,-440 v4(15,-390) ; v4(208.71,-198) 214.12,-198 221.96,-190.16 U3.23
  Bottom Layer w10: v4(15,-390) 15.85,-390 207.85,-198 v4(208.71,-198)
B1: MOTOR1.3 U3.13 | length 446.3
  Top Layer w10: U3.13 394.53,-65.47 420,-40
  Top Layer w30: 420,-40 710,-40 MOTOR1.3
B2: MOTOR1.4 U3.15 | length 567.5
  Top Layer w10: U3.15 355.16,-24.84
  Top Layer w30: 355.16,-24.84 380,0 460,80 690,80 MOTOR1.4
CFG0: U2.11 U3.5 | length 753.3
  Top Layer w10: U2.11@283.5,213.5 283.5,111.5 v2(285,110) ; U3.5 500.33,-209.84 502.46,-207.72 532.72,-207.72 555,-230 v2(556.59,-230)
  Bottom Layer w10: v2(285,110) 287.61,112.61 317.39,112.61 375,55 375,-130 496.81,-251.81 534.77,-251.81 v2(556.59,-230)
CFG1: U2.14 U3.4 | length 582.9
  Top Layer w10: U2.14 376.5,106.38 v2(400,82.88) ; U3.4@458.75,-229.75 523.91,-229.75 v2(524.15,-230)
  Bottom Layer w10: v2(400,82.88) 400,-125 505,-230 v2(524.15,-230)
CFG2: U2.12 U3.3 | length 768.8
  Top Layer w10: v2(312.88,82.88) 313.19,83.19 U2.12@313.19,214.69 ; U3.3 494.21,-249.21 535,-290 v2(535,-320)
  Bottom Layer w10: v2(312.88,82.88) 312.88,-129.57 503.31,-320 v2(535,-320)
CFG3: U2.13 U3.2 | length 647.7
  Top Layer w10: v2(337.08,62.08) 339.68,64.68 339.68,88.57 345,93.89 U2.13 ; U3.2 458.75,-269.12 484.12,-269.12 509.58,-294.58 v2(509.58,-295.42)
  Bottom Layer w10: v2(337.08,62.08) 337.08,-122.92 v2(509.58,-295.42)
CFG4: U2.19 U3.18 | length 637.5
  Top Layer w10: v2(255,170) 255,-65 276.79,-86.79 U3.18 ; v2@405,320 v2@405.65,320.65 ; v2(405,321.3) U2.19
  Bottom Layer w10: v2(255,170) 255,275 300,320 v2@405,320
CFG5: U2.20 U3.19 | length 789.2
  Top Layer w10: v4(230.44,-100.71) 234.83,-100.71 245.54,-111.42 U3.19 ; v2(390,352.8) U2.20
  Bottom Layer w10: v4(230.44,-100.71) 130,-0.27 130,175 307.8,352.8 v2(390,352.8)
DEBUG_LED: R3.2 U2.24 | length 116.8
  Top Layer w10: U2.24@484.26,477.32 507.69,477.32 555,430 R3.2
DIAG0: U2.7 U3.20 | length 524.3
  Top Layer w10: U2.7@175.91,290 200,290 215,275 215,250.72 190.82,226.54 190.82,-100.82 220.88,-130.88 271.25,-130.88 U3.20
DIAG1: U2.8 U3.21 | length 487
  Top Layer w10: U2.8 175.71,163.71 175.82,163.6 175.82,-120.47 206.14,-150.79 U3.21
DIP0: SW2.1 U2.1 | length 799.6
  Top Layer w10: SW2.1 -507.12,416.41 -507.12,362.12 -495,350 -430,350 -334.21,445.79 55.79,445.79 88.78,478.78 U2.1
DIP1: SW2.2 U2.2 | length 901.9
  Top Layer w10: SW2.2 -610,360 -585,335 -423.79,335 -328,430.79 62,430.79 78.5,447.28 U2.2
DIP2: SW2.3 U2.3 | length 1001.2
  Top Layer w10: SW2.3 -710,360 -670,320 -417.57,320 -321.79,415.79 U2.3
DIR: U2.16 U3.7 | length 480.9
  Top Layer w10: U2.16@439.74,214.74 439.74,145.26 v2(440,145) ; U3.7 512.33,-170.47 522.8,-160 v2(525,-160)
  Bottom Layer w10: v2(440,145) 482.5,102.5 482.5,-117.5 v2(525,-160)
DIV: R5.2 R6.1 | length 182.6
  Top Layer w10: R5.2 -180,-515.91 -180,-465 -155,-440 -120,-440 -95,-415 R6.1
EN: U2.17 U3.22 | length 930.6
  Top Layer w10: v4(115,-105) 115,-110 175.47,-170.47 U3.22 ; v2(245.77,321.62) 247.39,320 365,320 426.69,258.31 U2.17
  Bottom Layer w10: v4(115,-105) 115,190.85 226.2,302.05 v2(245.77,321.62)
GND: C1.1 C3.2 C4.1 C5.1 C6.2 C8.2 C9.2 C10.2 C11.2 C13.1 C14.2 CN1.3 CN1.5 D1.1 DS1.2 J1.2 J1.3 P1.2 P2.2 pad.MNT R5.3 R8.2 R9.2 R12.1 R13.1 R14.1 REG1.1 SW1.3 SW1.4 SW1.5 SW2.4 SW2.5 SW2.6 U1.7 U2.10 U2.28 U3.1 U3.9 U3.11 U3.12 U3.24 U3.35 U3.36 U3.37 | length 175.1
  Top Layer w30: CN1.3 206.91,738.09 206.91,713.09 230,690 C1.1 231.57,660 314.53,660 C3.2 ; C11.2 C11.2@220,24.65
  other v1: -738.78,-813.78 -663.78,-813.78 -588.78,-813.78 -513.78,-813.78 -438.78,-813.78 -138.78,-813.78 -63.78,-813.78 11.22,-813.78 86.22,-813.78 161.22,-813.78 236.22,-813.78 311.22,-813.78 386.22,-813.78 461.22,-813.78 536.22,-813.78 611.22,-813.78 686.22,-813.78 10,-760 85,-760 160,-760 -813.78,-738.78 -738.78,-738.78 -663.78,-738.78 -513.78,-738.78 -438.78,-738.78 -138.78,-738.78 -63.78,-738.78 236.22,-738.78 311.22,-738.78 386.22,-738.78 461.22,-738.78 536.22,-738.78 686.22,-738.78 761.22,-738.78 -315,-700 -235,-700 195,-665 -813.78,-663.78 -738.78,-663.78 -438.78,-663.78 -138.78,-663.78 -63.78,-663.78 386.22,-663.78 461.22,-663.78 761.22,-663.78 -275,-645 -813.78,-588.78 -438.78,-588.78 -363.78,-588.78 386.22,-588.78 461.22,-588.78 761.22,-588.78 -155,-575 50,-565 130,-565 210,-565 -813.78,-513.78 -738.78,-513.78 -513.78,-513.78 -438.78,-513.78 -363.78,-513.78 11.22,-513.78 86.22,-513.78 461.22,-513.78 761.22,-513.78 -125,-480 -813.78,-438.78 -738.78,-438.78 -663.78,-438.78 -438.78,-438.78 -363.78,-438.78 -213.78,-438.78 86.22,-438.78 761.22,-438.78 -813.78,-363.78 -738.78,-363.78 -663.78,-363.78 -363.78,-363.78 -213.78,-363.78 -138.78,-363.78 -63.78,-363.78 -813.78,-288.78 -738.78,-288.78 -213.78,-288.78 611.22,-288.78 315,-260 345,-260 375,-260 405,-260 315,-230 345,-230 375,-230 -813.78,-213.78 -738.78,-213.78 -663.78,-213.78 -513.78,-213.78 -438.78,-213.78 -363.78,-213.78 -213.78,-213.78 611.22,-213.78 686.22,-213.78 315,-200 345,-200 -155,-170 315,-170 -813.78,-138.78 -588.78,-138.78 -513.78,-138.78 -813.78,-63.78 -363.78,-63.78 -213.78,-63.78 -63.78,-63.78 11.22,-63.78 225,-45 700,5 -813.78,11.22 -63.78,11.22 11.22,11.22 560,25 -430,45 825,60 -813.78,86.22 761.22,86.22 225,100 548.78,123.78 -430,130 655,130 515,160 -813.78,161.22 -213.78,161.22 -138.78,161.22 563.78,173.78 -705,190 -620,190 -545,190 -465,190 478.78,198.78 735,200 528.78,213.78 -813.78,236.22 -738.78,236.22 -663.78,236.22 -588.78,236.22 -513.78,236.22 -438.78,236.22 -363.78,236.22 686.22,236.22 310,275 355,275 590,290 -813.78,311.22 -738.78,311.22 -363.78,311.22 -660,370 -560,370 -813.78,386.22 -438.78,386.22 -213.78,386.22 -138.78,386.22 686.22,386.22 810,390 -660,455 -560,455 -813.78,461.22 -438.78,461.22 -363.78,461.22 236.22,461.22 311.22,461.22 386.22,461.22 686.22,461.22 761.22,461.22 -813.78,536.22 -738.78,536.22 -438.78,536.22 -363.78,536.22 761.22,536.22 -813.78,611.22 -438.78,611.22 386.22,611.22 461.22,611.22 761.22,611.22 -813.78,686.22 -738.78,686.22 -438.78,686.22 -138.78,686.22 386.22,686.22 761.22,686.22 -738.78,761.22 -663.78,761.22 -588.78,761.22 -513.78,761.22 -438.78,761.22 -63.78,761.22 11.22,761.22 386.22,761.22 536.22,761.22 611.22,761.22 686.22,761.22
IFA: U1.5 U2.5 | length 449.2
  Top Layer w10: v2(-75,275) 2.8,352.8 U2.5
  Bottom Layer w10: U1.5 -77.56,272.44 v2(-75,275)
IFB: U1.8 U2.6 | length 291.1
  Top Layer w10: v2(70,275) 116.3,321.3 U2.6
  Bottom Layer w10: v2(70,275) 71.22,273.78 71.22,111.06 U1.8
IFC: U1.1 U2.4 | length 565.6
  Top Layer w10: v2(135,385) 135.35,384.65 U2.4@175.35,384.65
  Bottom Layer w10: U1.1 72.44,18.03 98.21,43.8 98.21,348.21 v2(135,385)
NetC5_2: C5.2 R7.1 U3.26 | length 392.5
  Top Layer w10: C5.2 -33.74,-249.21 5,-249.21 ; R7.1 24,-211 5,-230 5,-249.21 ; U3.26 5,-249.21
NetC7_1: C7.1 U3.27 | length 188.7
  Top Layer w10: C7.1 91.46,-285 175,-285 191.1,-268.9 U3.27
NetC7_2: C7.2 U3.28 | length 204.2
  Top Layer w10: C7.2 141.46,-343.54 196.42,-288.58 U3.28
NetD1_2: D1.2 R3.1 | length 85.8
  Top Layer w10: R3.1 588.54,346.46 600,335 632.48,335 D1.2
NetDS1_1: DS1.1 R4.1 | length 75
  Top Layer w10: R4.1 DS1.1
NetR8_1: R8.1 U3.33 | length 231
  Top Layer w10: U3.33 374.84,-350.2 444.64,-420 R8.1
NetR9_1: R9.1 U3.14 | length 206.6
  Top Layer w10: U3.14 374.84,-60.51 390,-45.36 390,-25.36 435.36,20 509.65,20 509.8,20.16 R9.1
NetR12_2: R12.2 U1.3 | length 110
  Bottom Layer w10: R12.2 -36.5,-170.5 -27.56,-161.56 U1.3
NetR13_2: R13.2 U1.2 | length 116.5
  Bottom Layer w10: U1.2 22.44,-156.44 47,-181 R13.2
NetR14_2: R14.2 U1.4 | length 136.5
  Bottom Layer w10: R14.2 -120,-135 -100,-115 -78.39,-115 U1.4
RESET: CN1.10 R1.2 SW1.1 SW1.2 U2.26 | length 1038.5
  Top Layer w10: CN1.10 410,790 ; U2.26@410,524.09 410,585 ; R1.2 449.41,790 410,790 ; SW1.2 776.5,173.5 765,185 765,260 776.5,271.5 SW1.1 776.5,338.5 675,440 575,440 430,585 410,585 ; 410,585 410,790
SCL: P1.3 P2.3 R10.1 U2.22 | length 2867.9
  Top Layer w10: P1.3 -355,725.87 -355,585 -280,510 R10.1 ; v2(360,415.79) U2.22
  Bottom Layer w10: P2.3 -355.74,-660.74 -290,-595 -290,600 -351.71,661.71 -351.71,722.58 P1.3 -295.83,790 -170,790 204.21,415.79 v2(360,415.79)
SDA: P1.1 P2.1 R11.1 U2.21 | length 2519.2
  Top Layer w10: R11.1 -235,608.54 -235,650 -200,685 P1.1 ; v2(375,384.29) U2.21
  Bottom Layer w10: P2.1 -198.26,-659.47 -265,-592.73 -265,600 -200,665 P1.1 -133.35,728.35 210.71,384.29 v2(375,384.29)
SPI_MODE: U2.18 U3.10 | length 603.6
  Top Layer w10: U3.10 483.58,-111.42 520.58,-74.42 587.39,-74.42 v2(590,-71.81) ; U2.18 525.19,289.81 v2(570,245)
  Bottom Layer w10: v2(570,245) 620,195 620,-41.81 v2(590,-71.81)
STEP: U2.15 U3.6 | length 566
  Top Layer w10: v2(406.6,166.98) U2.15@406.6,213.61 ; U3.6 544.92,-190.16 v2(545.23,-189.85)
  Bottom Layer w10: v2(406.6,166.98) 406.6,138.4 450,95 450,-125.85 514,-189.85 v2(545.23,-189.85)
SW_CLK: CN1.4 R2.1 U2.31 | length 622.1
  Top Layer w10: R2.1 155,560 ; CN1.4 170,825 105,825 80,800 80,605 125,560 155,560 ; U2.31 250.51,549.49 240,560 155,560
SW_DIO: CN1.2 U2.32 | length 460.6
  Top Layer w10: v2(55,753.19) 55,608.79 141.7,522.09 U2.32
  Bottom Layer w10: v2(55,753.19) 55,755 90,790 CN1.2
VBB: C8.1 C11.1 C12.2 C13.2 C14.1 J1.1 R4.2 REG1.3 U3.16 U3.30 U3.31 | length 3111.6
  Top Layer w10: R4.2 -655,-120 -465,-310 J1.1 ; 303.65,-20 335.47,-51.83 U3.16
  Top Layer w20: J1.1 -355,-310 -303.92,-258.92 ; C8.1 -243.37,-135 -211.68,-166.68 ; REG1.3 -119.45,-74.45 -211.68,-166.68 ; C13.2 315,-480 ; C12.2 253.54,-390 315,-390 ; v4(280,-45) 280,-43.65 303.65,-20 C11.1@303.65,21.71 ; C14.1@315,-675 315,-615 ; 325.79,-316.93 325.79,-352.36 315,-363.15 315,-390 ; v3(355,-520) 315,-520 ; -303.92,-258.92 -211.68,-166.68 ; -303.92,-258.92 -255,-307.83 -255,-550 -190,-615 315,-615 ; 315,-615 315,-520 ; 315,-520 315,-480 ; 315,-480 315,-390
  Bottom Layer w20: v4(280,-45) 280,-445 v3(355,-520)
VCP: C12.1 U3.29 | length 164.1
  Top Layer w10: C12.1 195.46,-355 205.46,-345 285,-345 296.1,-333.9 U3.29
VDD_CORE: C3.1 U2.29 | length 81.3
  Top Layer w10: C3.1@313.5,598.98 C3.1
  Top Layer w19.68: U2.29 313.5,543.93 316.25,546.67 316.25,594.57 313.5,597.31 C3.1@313.5,598.98
pads on no net: CN1.6 CN1.7 CN1.8 CN1.9 U2.23 U2.25 U2.27 U3.17

## Polygon pours and split planes (outlines as drawn)
GND on Bottom Layer "GND_L02_P001" (solid, remove dead copper, pour order 1): -856.3,-675.2 -856.3,675.2 -856.3,687.07 -853.2,710.6 -847.06,733.54 -837.97,755.47 -826.1,776.03 -811.65,794.86 -794.86,811.65 -776.03,826.1 -755.47,837.97 -733.54,847.06 -710.6,853.2 -687.07,856.3 -675.2,856.3 675.2,856.3 687.07,856.3 710.6,853.2 733.54,847.06 755.47,837.97 776.03,826.1 794.86,811.65 811.65,794.86 826.1,776.03 837.97,755.47 847.06,733.54 853.2,710.6 856.3,687.07 856.3,675.2 856.3,-675.2 856.3,-687.07 853.2,-710.6 847.06,-733.54 837.97,-755.47 826.1,-776.03 811.65,-794.86 794.86,-811.65 776.03,-826.1 755.47,-837.97 733.54,-847.06 710.6,-853.2 687.07,-856.3 675.2,-856.3 -675.2,-856.3 -687.07,-856.3 -710.6,-853.2 -733.54,-847.06 -755.47,-837.97 -776.03,-826.1 -794.86,-811.65 -811.65,-794.86 -826.1,-776.03 -837.97,-755.47 -847.06,-733.54 -853.2,-710.6 -856.3,-687.07 -856.3,-675.2
GND on Top Layer "GND_L01_P003" (solid, remove dead copper, pour order 3): -856.3,-675.2 -856.3,675.2 -856.3,687.07 -853.2,710.6 -847.06,733.54 -837.97,755.47 -826.1,776.03 -811.65,794.86 -794.86,811.65 -776.03,826.1 -755.47,837.97 -733.54,847.06 -710.6,853.2 -687.07,856.3 -675.2,856.3 675.2,856.3 687.07,856.3 710.6,853.2 733.54,847.06 755.47,837.97 776.03,826.1 794.86,811.65 811.65,794.86 826.1,776.03 837.97,755.47 847.06,733.54 853.2,710.6 856.3,687.07 856.3,675.2 856.3,-675.2 856.3,-687.07 853.2,-710.6 847.06,-733.54 837.97,-755.47 826.1,-776.03 811.65,-794.86 794.86,-811.65 776.03,-826.1 755.47,-837.97 733.54,-847.06 710.6,-853.2 687.07,-856.3 675.2,-856.3 -675.2,-856.3 -687.07,-856.3 -710.6,-853.2 -733.54,-847.06 -755.47,-837.97 -776.03,-826.1 -794.86,-811.65 -811.65,-794.86 -826.1,-776.03 -837.97,-755.47 -847.06,-733.54 -853.2,-710.6 -856.3,-687.07 -856.3,-675.2

## Other copper
Top Layer:
  rectangle net VBB: 311.02,-328.74 340.55,-298.23
  region net GND: 256,-205 256,-215 287,-215 297,-225 304,-225 304,-195 297,-195 287,-205
  region net GND: 409,-329 409,-288 399,-278 399,-264 433,-264 433,-271 445,-283 474,-283 474,-294 439,-329
  region net GND: 439,-71 439,-99 434,-104 434,-124 395,-124 409,-110 409,-71
  region net GND: 439,-126 434,-121 429,-121 429,-140 435,-140 439,-136 474,-136 474,-126

## Silkscreen, mask and mechanical layers (free items; w line width, h text height)
Top Overlay:
  text "PREV." at -78,660 h60 r90
  text "RESET" at 664.63,165 h45 r90
  text "NEXT" at -75,-840 h60 r90
Bottom Overlay:
  text "Amped Up!" at 437.94,406.13 h300
  text "SDP 2021 Team 4" at 270.91,279.72 h80
  text "Rev. 1" at -800.28,-158.95 h80 r270
  text "Daughter Board" at -731.5,-423.3 h120 r270
Mechanical 1:
  lines w15: -856.3,-675.2 ccw(c-675.2,-675.2) -675.2,-856.3 675.2,-856.3 ccw(c675.2,-675.2) 856.3,-675.2 856.3,675.2 ccw(c675.2,675.2) 675.2,856.3 -675.2,856.3 ccw(c-675.2,675.2) -856.3,675.2 -856.3,-675.2